# Altium PCB PCB1.PcbDoc (part 2 of 3)
Units mm, origin at the board's own origin, x right, y up, seen from the top; angles counter-clockwise.
Board outline 100 x 60 mm, 4 copper layers (Top Layer, GND, POWER, Bottom Layer), stack 1.592 mm thick; 134 components, 201 nets, 911 pads, 539 vias.
Unrouted connection lines stored in the file: 3.
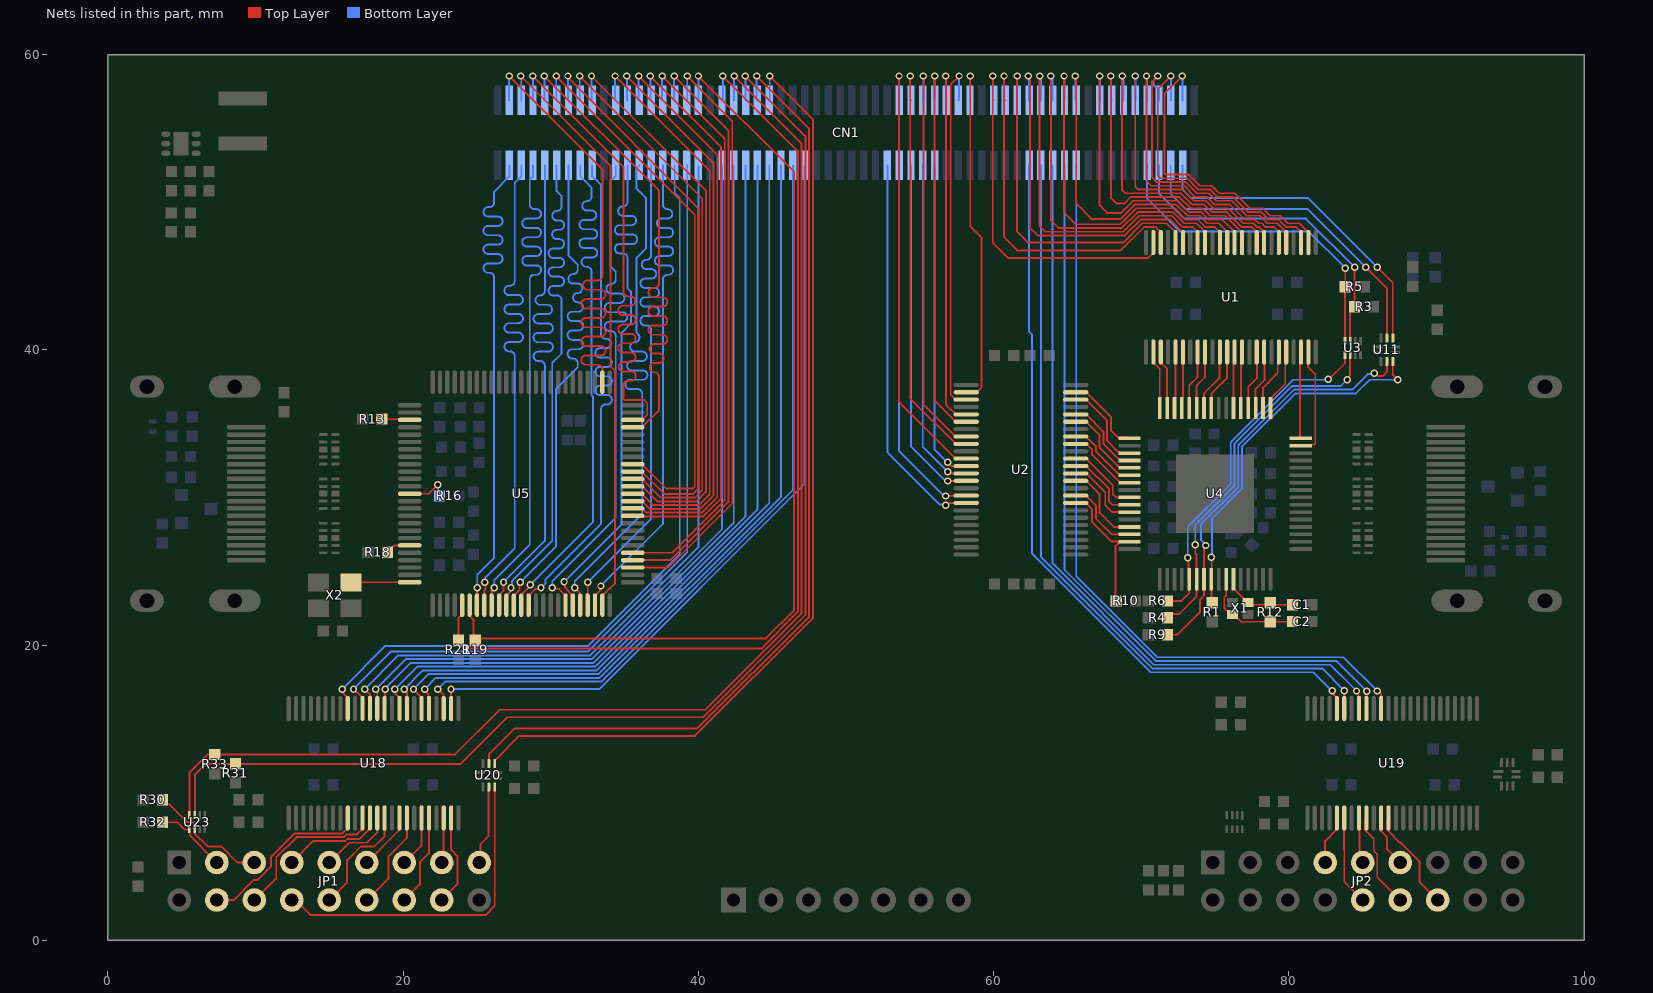
[diagram p4: the nets of this part, all layers, seen from the top]

## Via types
v1: diameter 0.5, hole 0.3, Top Layer to Bottom Layer, tented top, 493 vias
v2: diameter 0.5, hole 0.3, Top Layer to Bottom Layer, 46 vias

## Nets (pads, with @x,y where several pads share a name; then routed paths per layer and width w, separated by ;. In a path a pad name is that pad's centre, name@x,y a point inside that pad or via, vN(x,y) a via of type N, cw(c..) or ccw(c..) an arc to the next point about the centre after c; other vN are vias at no path point) (continued)
ADV_RX_DE_1V8: CN1.49 U2.38 | length 23.7
  Top Layer w0.127: v1(56.896,31.115) 58.128,31.115 U2.38@58.141,31.128
  Bottom Layer w0.127: CN1.49@54.399,52.497 54.399,33.474 56.66,31.213 56.711,31.213 56.809,31.115 v1(56.896,31.115)
ADV_RX_DE_3V3: U2.11 U4.45 | length 5.7
  Top Layer w0.127: U2.11@65.557,31.128 66.275,31.128 67.183,30.22 67.183,28.956 68.135,28.004 U4.45@69.201,28.004
ADV_RX_HS_1V8: CN1.51 U2.40 | length 25.2
  Top Layer w0.127: v1(56.769,30.099) 56.783,30.113 58.127,30.113 U2.40@58.141,30.127
  Bottom Layer w0.127: CN1.51@53.599,52.497 53.599,33.142 56.521,30.22 56.547,30.22 56.668,30.099 v1(56.769,30.099)
ADV_RX_HS_3V3: U2.9 U4.46 | length 5.3
  Top Layer w0.127: U2.9@65.557,30.127 66.275,30.127 66.929,29.473 66.929,28.575 67.998,27.506 U4.46@69.201,27.506
ADV_RX_INT1_1V8: CN1.5 U11.9 | length 22.6
  Top Layer w0.127: v1(85.217,45.593) 86.639,44.171 U11.9@86.639,40.805
  Bottom Layer w0.127: CN1.5@71.999,52.497 71.999,50.556 73.025,49.53 81.28,49.53 v1(85.217,45.593)
ADV_RX_INT1_3V3: R9.1 U4.55 U11.4 | length 28.5
  Top Layer w0.127: R9.1@71.77,20.701 72.45,20.701 73.993,22.244 73.993,23.096 74.251,23.354 U4.55@74.251,24.455 74.251,26.534 74.363,26.646 v1(74.363,26.747) ; v1(85.775,38.413) 85.876,38.413 86.069,38.221 86.354,38.221 86.639,38.506 U11.4@86.639,39.205
  Bottom Layer w0.127: v1(74.363,26.747) 74.363,26.816 74.041,27.138 74.041,28.172 76.57,30.701 76.57,33.526 80.348,37.304 84.282,37.304 85.335,38.357 85.718,38.357 v1(85.775,38.413)
ADV_RX_LLC_1V8: CN1.22 U1.37 | length 22.9
  Top Layer w0.127: v1(65.532,58.547) 65.594,58.485 65.594,49.916 66.65,48.859 68.572,48.859 69.554,49.841 72.374,49.841 73.136,49.079 73.949,49.079 74.457,48.571 75.24,48.571 75.824,47.987 U1.37@75.824,47.269
  Bottom Layer w0.127: v1(65.532,58.547) 65.532,56.965 CN1.22@65.601,56.896
ADV_RX_LLC_3V3: U1.12 U4.25 | length 4.2
  Top Layer w0.127: U4.25@74.751,36.055 74.751,37.031 75.819,38.099 U1.12@75.819,39.797
ADV_RX_P0_1V8: CN1.47 U2.37 | length 22.7
  Top Layer w0.127: v1(56.896,31.75) 56.983,31.75 57.105,31.628 U2.37@58.141,31.628
  Bottom Layer w0.127: CN1.47@55.199,52.497 55.199,33.446 v1(56.896,31.75)
ADV_RX_P0_3V3: U2.12 U4.43 | length 5.2
  Top Layer w0.127: U2.12@65.557,31.628 66.275,31.628 67.564,30.339 67.564,29.464 68.024,29.004 U4.43@69.201,29.004
ADV_RX_P1_1V8: CN1.45 U2.36 | length 21.9
  Top Layer w0.127: v1(56.896,32.385) 56.896,32.375 57.14,32.131 58.136,32.131 U2.36@58.141,32.126
  Bottom Layer w0.127: CN1.45@55.999,52.497 55.999,33.233 56.848,32.385 v1(56.896,32.385)
ADV_RX_P1_3V3: U2.13 U4.42 | length 5.2
  Top Layer w0.127: U2.13@65.557,32.126 66.275,32.126 67.818,30.583 67.818,29.718 68.031,29.505 U4.42@69.201,29.505
ADV_RX_P2_1V8: CN1.52 U2.35 | length 29.9
  Top Layer w0.127: v1(53.594,58.547) 53.594,36.455 57.423,32.626 U2.35@58.141,32.626
  Bottom Layer w0.127: v1(53.594,58.547) 53.594,56.901 CN1.52@53.599,56.896
ADV_RX_P2_3V3: U2.14 U4.41 | length 5.1
  Top Layer w0.127: U2.14@65.557,32.626 66.275,32.626 68.072,30.829 68.072,30.226 68.293,30.005 U4.41@69.201,30.005
ADV_RX_P3_1V8: CN1.50 U2.33 | length 28.6
  Top Layer w0.127: v1(54.356,58.547) 54.356,36.694 57.423,33.627 U2.33@58.141,33.627
  Bottom Layer w0.127: v1(54.356,58.547) 54.356,56.939 CN1.50@54.399,56.896
ADV_RX_P3_3V3: U2.16 U4.39 | length 4.9
  Top Layer w0.127: U2.16@65.557,33.627 66.275,33.627 66.675,33.227 66.675,32.885 68.372,31.189 68.392,31.189 68.575,31.006 U4.39@69.201,31.006
ADV_RX_P4_1V8: CN1.48 U2.32 | length 27.7
  Top Layer w0.127: v1(55.245,58.547) 55.245,36.305 57.423,34.127 U2.32@58.141,34.127
  Bottom Layer w0.127: CN1.48@55.199,56.896 55.245,56.942 v1(55.245,58.547)
ADV_RX_P4_3V3: U2.17 U4.38 | length 4.9
  Top Layer w0.127: U2.17@65.557,34.127 66.275,34.127 66.929,33.473 66.929,33.132 68.372,31.689 68.39,31.689 68.575,31.504 U4.38@69.201,31.504
ADV_RX_P5_1V8: CN1.46 U2.30 | length 26.4
  Top Layer w0.127: v1(56.007,58.547) 56.007,36.544 57.423,35.128 U2.30@58.141,35.128
  Bottom Layer w0.127: CN1.46@55.999,56.896 56.007,56.904 v1(56.007,58.547)
ADV_RX_P5_3V3: U2.19 U4.37 | length 5.4
  Top Layer w0.127: U2.19@65.557,35.128 66.275,35.128 67.183,34.22 67.183,33.378 68.372,32.189 68.39,32.189 68.575,32.004 U4.37@69.201,32.004
ADV_RX_P6_1V8: CN1.44 U2.29 | length 25.6
  Top Layer w0.127: v1(56.769,58.547) 56.769,36.28 57.423,35.626 U2.29@58.141,35.626
  Bottom Layer w0.127: v1(56.769,58.547) 56.769,56.927 CN1.44@56.8,56.896
ADV_RX_P6_3V3: U2.20 U4.36 | length 5.4
  Top Layer w0.127: U2.20@65.557,35.626 66.275,35.626 67.437,34.464 67.437,33.625 68.372,32.69 68.39,32.69 68.575,32.504 U4.36@69.201,32.504
ADV_RX_P7_1V8: CN1.42 U2.27 | length 24.7
  Top Layer w0.127: v1(57.658,58.547) 57.093,57.982 57.093,36.957 57.423,36.627 U2.27@58.141,36.627
  Bottom Layer w0.127: CN1.42@57.6,56.896 57.658,56.954 v1(57.658,58.547)
ADV_RX_P7_3V3: U2.22 U4.35 | length 5.9
  Top Layer w0.127: U2.22@65.557,36.627 66.275,36.627 67.691,35.211 67.691,33.837 68.417,33.112 68.468,33.112 68.575,33.005 U4.35@69.201,33.005
ADV_RX_P8_1V8: CN1.40 U2.26 | length 24.3
  Top Layer w0.127: U2.26@58.141,37.127 58.858,37.127 59.188,37.457 59.188,47.591 58.42,48.359 v1(58.42,58.547)
  Bottom Layer w0.127: CN1.40@58.4,56.896 58.42,56.916 v1(58.42,58.547)
ADV_RX_P8_3V3: U2.23 U4.33 | length 5.5
  Top Layer w0.127: U2.23@65.557,37.127 66.275,37.127 67.945,35.457 67.945,34.544 68.422,34.067 69.14,34.067 U4.33@69.201,34.006
ADV_RX_P9_1V8: CN1.36 U1.47 | length 25.1
  Top Layer w0.127: v1(59.944,58.547) 59.944,47.244 60.966,46.222 70.459,46.222 70.823,46.585 U1.47@70.823,47.269
  Bottom Layer w0.127: v1(59.944,58.547) 59.944,56.952 CN1.36@60,56.896
ADV_RX_P9_3V3: U1.2 U4.32 | length 4
  Top Layer w0.127: U1.2@70.823,39.853 70.823,39.135 71.251,38.707 U4.32@71.251,36.055
ADV_RX_P10_1V8: CN1.34 U1.46 | length 25.1
  Top Layer w0.127: v1(60.706,58.547) 60.706,47.625 61.595,46.736 68.605,46.736 70.186,48.317 70.993,48.317 71.323,47.987 U1.46@71.323,47.269
  Bottom Layer w0.127: v1(60.706,58.547) 60.706,56.99 CN1.34@60.8,56.896
ADV_RX_P10_3V3: U1.3 U4.31 | length 4
  Top Layer w0.127: U1.3@71.323,39.853 71.323,39.135 71.751,38.707 U4.31@71.751,36.055
ADV_RX_P11_1V8: CN1.32 U1.44 | length 24.7
  Top Layer w0.127: v1(61.595,58.547) 61.595,48.006 62.332,47.269 68.779,47.269 70.08,48.571 71.706,48.571 72.324,47.954 U1.44@72.324,47.269
  Bottom Layer w0.127: CN1.32@61.595,56.901 v1(61.595,58.547)
ADV_RX_P11_3V3: U1.5 U4.30 | length 3.8
  Top Layer w0.127: U4.30@72.252,36.055 72.252,36.681 72.324,36.754 U1.5@72.324,39.853
ADV_RX_P12_1V8: CN1.30 U1.43 | length 24.1
  Top Layer w0.127: v1(62.357,58.547) 62.357,58.46 62.461,58.356 62.461,48.283 62.997,47.747 68.897,47.747 69.975,48.825 71.953,48.825 72.824,47.954 U1.43@72.824,47.269
  Bottom Layer w0.127: v1(62.357,58.547) 62.4,58.504 CN1.30@62.4,56.896
ADV_RX_P12_3V3: U1.6 U4.29 | length 3.8
  Top Layer w0.127: U4.29@72.75,36.055 72.75,36.681 72.824,36.756 U1.6@72.824,39.853
ADV_RX_P13_1V8: CN1.28 U1.41 | length 24.3
  Top Layer w0.127: v1(63.119,58.547) 63.119,48.387 63.505,48.001 68.791,48.001 69.87,49.079 72.058,49.079 72.82,48.317 73.492,48.317 73.823,47.987 U1.41@73.823,47.269
  Bottom Layer w0.127: v1(63.119,58.547) 63.119,58.46 63.2,58.378 CN1.28@63.2,56.896
ADV_RX_P13_3V3: U1.8 U4.28 | length 4
  Top Layer w0.127: U4.28@73.25,36.055 73.25,37.587 73.823,38.159 U1.8@73.823,39.853
ADV_RX_P14_1V8: CN1.26 U1.40 | length 23.9
  Top Layer w0.127: v1(63.881,58.547) 63.881,48.768 64.394,48.255 68.686,48.255 69.765,49.333 72.163,49.333 72.925,48.571 73.739,48.571 74.323,47.987 U1.40@74.323,47.269
  Bottom Layer w0.127: v1(63.881,58.547) 63.881,58.46 64,58.34 CN1.26@64,56.896
ADV_RX_P14_3V3: U1.9 U4.27 | length 4
  Top Layer w0.127: U4.27@73.75,36.055 73.75,37.587 74.323,38.159 U1.9@74.323,39.853
ADV_RX_P15_1V8: CN1.24 U1.38 | length 23.6
  Top Layer w0.127: v1(64.77,58.547) 64.77,49.302 65.563,48.509 68.581,48.509 69.66,49.587 72.268,49.587 73.03,48.825 73.844,48.825 74.352,48.317 74.994,48.317 75.324,47.987 U1.38@75.324,47.269
  Bottom Layer w0.127: v1(64.77,58.547) 64.801,58.516 CN1.24@64.801,56.896
ADV_RX_P15_3V3: U1.11 U4.26 | length 4.2
  Top Layer w0.127: U4.26@74.251,36.055 74.251,37.048 75.311,38.108 U1.11@75.311,39.85
ADV_RX_P16_1V8: CN1.18 U1.36 | length 21.7
  Top Layer w0.127: v1(67.183,58.547) 67.183,49.784 67.691,49.276 68.63,49.276 69.028,49.674 69.449,50.095 72.479,50.095 73.241,49.333 74.054,49.333 74.562,48.825 75.484,48.825 76.322,47.987 U1.36@76.322,47.269
  Bottom Layer w0.127: v1(67.183,58.547) 67.201,58.529 CN1.18@67.201,56.896
ADV_RX_P16_3V3: U1.13 U4.22 | length 3.8
  Top Layer w0.127: U4.22@76.25,36.055 76.25,39.022 76.322,39.094 U1.13@76.322,39.853
ADV_RX_P17_1V8: CN1.16 U1.35 | length 20.8
  Top Layer w0.127: v1(67.945,58.547) 67.945,50.292 68.326,49.911 68.834,49.911 69.272,50.349 72.584,50.349 73.346,49.587 74.16,49.587 74.668,49.079 75.697,49.079 76.822,47.954 U1.35@76.822,47.269
  Bottom Layer w0.127: v1(67.945,58.547) 67.945,56.949 CN1.16@67.998,56.896
ADV_RX_P17_3V3: U1.14 U4.21 | length 3.8
  Top Layer w0.127: U4.21@76.75,36.055 76.75,39.022 76.822,39.094 U1.14@76.822,39.853
ADV_RX_P18_1V8: CN1.14 U1.33 | length 20.4
  Top Layer w0.127: v1(68.707,58.547) 68.707,50.8 68.904,50.603 69.688,50.603 72.689,50.603 73.451,49.841 74.265,49.841 74.773,49.333 75.802,49.333 76.818,48.317 77.493,48.317 77.823,47.987 U1.33@77.823,47.269
  Bottom Layer w0.127: v1(68.707,58.547) 68.707,58.46 68.799,58.368 CN1.14@68.799,56.896
ADV_RX_P18_3V3: U1.16 U4.20 | length 4
  Top Layer w0.127: U4.20@77.25,36.055 77.25,37.499 77.851,38.1 U1.16@77.851,39.835
ADV_RX_P19_1V8: CN1.12 U1.32 | length 19.9
  Top Layer w0.127: v1(69.596,58.547) 69.596,51.054 69.793,50.857 70.556,50.857 72.794,50.857 73.556,50.095 74.37,50.095 74.878,49.587 75.907,49.587 76.923,48.571 77.598,48.571 77.852,48.317 77.993,48.317 78.323,47.987 U1.32@78.323,47.269
  Bottom Layer w0.127: CN1.12@69.599,56.896 v1@69.599,58.544
ADV_RX_P19_3V3: U1.17 U4.19 | length 4.1
  Top Layer w0.127: U4.19@77.751,36.055 77.751,37.365 78.359,37.973 78.359,38.992 78.353,38.998 78.353,39.881 U1.17@78.359,39.887
ADV_RX_P20_1V8: CN1.10 U1.30 | length 19.9
  Top Layer w0.127: v1(70.358,58.547) 70.358,51.415 70.662,51.111 72.9,51.111 73.662,50.349 74.475,50.349 74.983,49.841 76.012,49.841 77.028,48.825 77.703,48.825 77.957,48.571 78.161,48.571 78.415,48.317 78.994,48.317 79.324,47.987 U1.30@79.324,47.269
  Bottom Layer w0.127: v1(70.358,58.547) 70.399,58.506 CN1.10@70.399,56.896
ADV_RX_P20_3V3: U1.19 U4.18 | length 4.2
  Top Layer w0.127: U4.18@78.251,36.055 78.251,37.445 79.248,38.442 U1.19@79.248,39.802
ADV_RX_P21_1V8: CN1.8 U1.29 | length 20.3
  Top Layer w0.127: v1(71.12,58.547) 70.739,58.166 70.739,51.689 71.063,51.365 73.005,51.365 73.767,50.603 74.58,50.603 75.088,50.095 76.118,50.095 77.134,49.079 78.012,49.079 78.52,48.571 79.207,48.571 79.822,47.956 U1.29@79.822,47.269
  Bottom Layer w0.127: v1(71.12,58.547) 70.818,58.245 70.818,57.996 70.839,57.974 70.839,57.906 70.914,57.832 71.012,57.832 71.199,57.645 CN1.8@71.199,56.896
ADV_RX_P21_3V3: U1.20 U4.17 | length 4.3
  Top Layer w0.127: U4.17@78.752,36.055 78.752,36.681 79.756,37.686 79.756,39.028 79.793,39.065 79.793,39.824 U1.20@79.756,39.861
ADV_RX_P22_1V8: CN1.6 U1.27 | length 20.8
  Top Layer w0.127: v1(72.009,58.547) 71.12,57.658 71.12,51.816 71.317,51.619 72.99,51.619 73.11,51.619 73.872,50.857 74.686,50.857 75.194,50.349 76.223,50.349 77.239,49.333 78.118,49.333 78.625,48.825 79.312,48.825 79.82,48.317 80.493,48.317 80.823,47.987 U1.27@80.823,47.269
  Bottom Layer w0.127: CN1.6@71.999,56.896 72.009,56.906 v1(72.009,58.547)
ADV_RX_P22_3V3: U1.22 U4.16 | length 5.9
  Top Layer w0.127: U1.22@80.757,39.857 80.794,39.82 80.794,39.065 80.757,39.028 80.757,34.05 U4.16@80.801,34.006
ADV_RX_P23_1V8: CN1.4 U1.26 | length 20.8
  Top Layer w0.127: v1(72.771,58.547) 71.571,57.347 71.571,51.947 71.645,51.873 73.215,51.873 73.977,51.111 74.791,51.111 75.299,50.603 76.328,50.603 77.344,49.587 78.223,49.587 78.731,49.079 79.417,49.079 79.925,48.571 80.706,48.571 81.323,47.954 U1.26@81.323,47.269
  Bottom Layer w0.127: v1(72.771,58.547) 72.799,58.519 CN1.4@72.799,56.896
ADV_RX_P23_3V3: U1.23 U4.15 | length 7.4
  Top Layer w0.127: U4.15@80.801,33.505 80.862,33.566 81.714,33.566 81.788,33.641 81.788,38.354 81.294,38.848 U1.23@81.294,39.811
ADV_RX_RESETN_1V8: CN1.3 U11.8 | length 22.2
  Top Layer w0.127: v1(85.979,45.593) 87.039,44.533 U11.8@87.039,40.805
  Bottom Layer w0.127: CN1.3@72.799,52.497 72.799,50.852 73.36,50.292 81.28,50.292 v1(85.979,45.593)
ADV_RX_RESETN_3V3: R1.1 U4.56 U11.5 | length 25.3
  Top Layer w0.127: v1(74.75,25.94) 74.777,25.913 74.777,24.481 U4.56@74.751,24.455 74.751,22.927 R1.1@74.803,22.875 ; U11.5@87.039,39.205 87.039,38.31 v1(87.376,37.973)
  Bottom Layer w0.127: v1(74.75,25.94) 74.803,25.993 74.803,28.575 76.824,30.596 76.824,33.421 80.453,37.05 84.548,37.05 85.471,37.973 v1(87.376,37.973)
ADV_RX_SCL_1V8: CN1.9 R5.1 U3.4 | length 22.5
  Top Layer w0.127: U3.4@83.802,40.612 83.802,44.264 R5.1@83.805,44.267 ; R5.1@83.82,44.282 v1(83.82,45.537)
  Bottom Layer w0.127: CN1.9@70.399,52.497 70.399,50.251 72.644,48.006 81.358,48.006 83.82,45.544 v1(83.82,45.537)
ADV_RX_SCL_3V3: R6.2 U3.5 U4.53 | length 23.7
  Top Layer w0.127: R6.2@71.77,22.987 72.723,22.987 73.25,23.514 U4.53@73.25,24.455 73.201,24.504 73.201,25.859 v1(73.152,25.908) ; v1(82.677,37.998) 82.702,37.998 83.802,39.098 U3.5@83.802,39.652
  Bottom Layer w0.127: v1(73.152,25.908) 73.152,28.002 76.062,30.912 76.062,33.736 80.299,37.973 82.652,37.973 v1(82.677,37.998)
ADV_RX_SDA_1V8: CN1.7 R3.1 U3.3 | length 22.3
  Top Layer w0.127: U3.3@84.153,40.612 84.153,42.639 84.455,42.941 v1(84.455,45.593)
  Bottom Layer w0.127: CN1.7@71.199,52.497 71.199,50.594 72.898,48.895 81.153,48.895 v1(84.455,45.593)
ADV_RX_SDA_3V3: R4.2 U3.6 U4.54 | length 25.3
  Top Layer w0.127: R4.2@71.77,21.844 72.024,22.098 72.558,22.098 73.738,23.278 73.738,24.443 U4.54@73.75,24.455 73.75,26.133 73.66,26.224 v1(73.66,26.797) ; v1(83.947,37.973) 83.947,38.074 84.153,38.28 U3.6@84.153,39.652
  Bottom Layer w0.127: v1(73.66,26.797) 73.66,28.15 76.316,30.806 76.316,33.631 80.243,37.558 83.532,37.558 v1(83.947,37.973)
ADV_RX_VS_ALSB_1V8: CN1.53 U2.41 | length 26.3
  Top Layer w0.127: v1(56.769,29.464) 56.87,29.464 57.032,29.627 U2.41@58.141,29.627
  Bottom Layer w0.127: CN1.53@52.799,52.497 52.799,33.053 56.329,29.523 56.71,29.523 v1(56.769,29.464)
ADV_RX_VS_ALSB_3V3: R10.2 U2.8 U4.47 | length 9.4
  Top Layer w0.127: U2.8@65.557,29.627 66.242,29.627 66.675,29.193 66.675,28.321 67.991,27.005 68.575,27.005 U4.47@69.201,27.005 ; R10.2@68.311,22.987 68.26,23.038 68.26,26.717 68.363,26.82 68.381,26.82 68.505,26.944 68.514,26.944 68.566,26.996 U4.47@68.566,27.005
ADV_RX_XTALN: C1.2 R12.2 U4.59 X1.3 | length 5.2
  Top Layer w0.102: U4.59@76.25,24.455 76.25,23.829 76.909,23.17 76.909,23.128 77.158,22.879 X1.3@77.233,22.879 77.364,22.748 78.613,22.748 R12.2@78.74,22.875 78.882,22.733 C1.2@80.249,22.733
ADV_RX_XTALP: C2.2 R12.1 U4.58 X1.1 | length 7
  Top Layer w0.102: U4.58@75.752,24.455 75.752,23.374 75.63,23.253 75.63,22.505 75.807,22.328 75.934,22.328 X1.1@76.183,22.079 76.258,22.079 76.762,21.575 R12.1@78.74,21.575 80.137,21.575 80.152,21.59 C2.2@80.249,21.59
ADV_TX_CEC_CLK: U5.50 X2.3 | length 4
  Top Layer w0.127: X2.3@16.467,24.242 16.48,24.255 U5.50@20.449,24.255
ADV_TX_D4: CN1.110 U5.92 | length 38.3
  Top Layer w0.127: v1(30.368,58.547) 39.751,49.164 39.751,30.734 39.624,30.607 37.829,30.607 36.18,32.256 U5.92@35.549,32.256
  Bottom Layer w0.127: v1(30.368,58.547) 30.368,56.927 CN1.110@30.399,56.896
ADV_TX_D5: CN1.108 U5.91 | length 38.5
  Top Layer w0.127: v1(31.166,58.547) 31.166,58.46 31.282,58.344 31.282,58.329 40.005,49.606 40.005,30.607 39.644,30.246 37.689,30.246 36.18,31.755 U5.91@35.549,31.755
  Bottom Layer w0.127: v1(31.166,58.547) 31.166,56.929 CN1.108@31.199,56.896
ADV_TX_D6: CN1.106 U5.90 | length 38.6
  Top Layer w0.127: v1(31.963,58.547) 40.259,50.251 40.259,30.48 39.771,29.992 37.442,29.992 36.18,31.255 U5.90@35.549,31.255
  Bottom Layer w0.127: v1(31.963,58.547) 31.963,56.932 CN1.106@31.999,56.896
ADV_TX_D7: CN1.104 U5.89 | length 38.7
  Top Layer w0.127: v1(32.761,58.547) 40.513,50.795 40.513,30.758 40.513,30.375 39.877,29.738 37.215,29.738 36.199,30.754 U5.89@35.549,30.754
  Bottom Layer w0.127: v1(32.761,58.547) 32.761,56.934 CN1.104@32.799,56.896
ADV_TX_D8: CN1.100 U5.88 | length 38.5
  Top Layer w0.127: v1(34.356,58.547) 40.767,52.136 40.767,30.226 40.025,29.484 36.95,29.484 36.18,30.254 U5.88@35.549,30.254
  Bottom Layer w0.127: v1(34.356,58.547) 34.356,56.939 CN1.100@34.399,56.896
ADV_TX_D9: CN1.98 U5.87 | length 38.6
  Top Layer w0.127: v1(35.154,58.547) 41.021,52.68 41.021,30.121 40.131,29.23 36.706,29.23 36.183,29.754 U5.87@35.549,29.754
  Bottom Layer w0.127: v1(35.154,58.547) 35.154,56.942 CN1.98@35.199,56.896
ADV_TX_D10: CN1.96 U5.86 | length 38.7
  Top Layer w0.127: U5.86@35.549,29.256 36.18,29.256 36.46,28.976 40.236,28.976 41.275,30.016 41.275,53.223 v1(35.951,58.547)
  Bottom Layer w0.127: v1(35.951,58.547) 35.951,56.944 CN1.96@36,56.896
ADV_TX_D11: CN1.94 U5.85 | length 38.8
  Top Layer w0.127: U5.85@35.549,28.755 35.582,28.722 40.341,28.722 41.529,29.91 41.529,53.767 v1(36.749,58.547)
  Bottom Layer w0.127: v1(36.749,58.547) 36.749,56.947 CN1.94@36.8,56.896
ADV_TX_D16: CN1.92 U5.80 | length 39.9
  Top Layer w0.127: U5.80@35.549,26.256 38.234,26.256 41.783,29.805 41.783,54.31 v1(37.546,58.547)
  Bottom Layer w0.127: CN1.92@37.546,56.896 v1(37.546,58.547)
ADV_TX_D17: CN1.88 U5.78 | length 40.4
  Top Layer w0.127: U5.78@35.549,25.255 37.955,25.255 42.291,29.591 42.291,55.499 v1(39.243,58.547)
  Bottom Layer w0.127: CN1.88@39.2,56.896 39.243,56.939 v1(39.243,58.547)
ADV_TX_D18: CN1.116 U5.74 | length 40.5
  Top Layer w0.127: v1(27.973,58.549) 34.036,52.485 34.036,38.9 34.354,38.583 34.354,24.191 34.036,23.873 33.499,23.336 U5.74@33.499,22.705
  Bottom Layer w0.127: v1(27.973,58.549) 27.999,58.523 CN1.116@27.999,56.896
ADV_TX_D19: CN1.91 U5.73 | length 38
  Top Layer w0.127: U5.73@32.999,22.705 32.999,23.389 33.033,23.389 33.33,23.686 33.33,23.932 v1(33.401,24.003)
  Bottom Layer w0.127: v1(33.401,24.003) 37.6,28.202 37.6,44.069 37.6,44.768 cw(c37.917,44.768) 37.917,45.085 37.974,45.085 ccw(c37.974,45.403) 37.974,45.72 37.371,45.72 cw(c37.371,46.038) 37.371,46.355 37.974,46.355 ccw(c37.974,46.673) 37.974,46.99 37.371,46.99 cw(c37.371,47.308) 37.371,47.625 37.974,47.625 ccw(c37.974,47.943) 37.974,48.26 37.501,48.26 cw(c37.501,48.578) 37.501,48.895 37.917,48.895 ccw(c37.917,49.213) 37.917,49.53 cw(c37.917,49.848) 37.6,49.848 37.6,50.665 CN1.91@37.6,52.497
ADV_TX_D20: CN1.93 U5.72 | length 37.9
  Top Layer w0.127: U5.72@32.498,22.705 32.505,22.712 32.505,24.25 v1(32.512,24.257)
  Bottom Layer w0.127: v1(32.512,24.257) 36.8,28.545 36.8,41.275 36.8,41.338 ccw(c36.482,41.338) 36.482,41.656 36.386,41.656 cw(c36.386,41.973) 36.386,42.291 37.028,42.291 ccw(c37.028,42.608) 37.028,42.926 36.386,42.926 cw(c36.386,43.243) 36.386,43.561 37.028,43.561 ccw(c37.028,43.878) 37.028,44.196 36.386,44.196 cw(c36.386,44.513) 36.386,44.831 36.827,44.831 ccw(c36.827,45.148) 36.827,45.466 36.482,45.466 cw(c36.482,45.783) 36.482,46.101 ccw(c36.482,46.418) 36.8,46.418 36.8,47.212 CN1.93@36.8,52.497
ADV_TX_D21: CN1.95 U5.71 | length 38
  Top Layer w0.127: v1(31.623,23.876) 31.965,23.534 31.965,22.738 U5.71@31.998,22.705
  Bottom Layer w0.127: v1(31.623,23.876) 31.623,24.315 36.195,28.887 36.195,36.957 36.195,37.02 ccw(c35.877,37.02) 35.877,37.338 35.369,37.338 cw(c35.369,37.655) 35.369,37.973 36.228,37.973 ccw(c36.228,38.291) 36.228,38.608 35.49,38.608 cw(c35.49,38.925) 35.49,39.243 36.195,39.243 ccw(c36.195,39.56) 36.195,39.878 35.695,39.878 cw(c35.695,40.195) 35.695,40.513 ccw(c35.695,40.831) 35.92,41.055 35.814,41.161 35.814,41.656 35.814,46.228 36.449,46.863 36.449,50.292 35.814,50.927 35.814,52.311 CN1.95@36,52.497
ADV_TX_D22: CN1.97 U5.70 | length 37.6
  Top Layer w0.127: v1(30.901,24.297) 30.972,24.226 30.972,23.883 31.5,23.355 U5.70@31.5,22.705
  Bottom Layer w0.127: v1(30.901,24.297) 34.798,28.194 34.798,41.148 35.433,41.783 35.433,43.942 35.199,44.176 35.199,46.155 35.199,46.218 ccw(c34.882,46.218) 34.882,46.536 34.661,46.536 cw(c34.661,46.853) 34.661,47.171 35.543,47.171 ccw(c35.543,47.488) 35.543,47.806 34.661,47.806 cw(c34.661,48.123) 34.661,48.441 35.47,48.441 ccw(c35.47,48.758) 35.47,49.076 34.882,49.076 cw(c34.882,49.393) 34.882,49.711 ccw(c34.882,50.028) 35.199,50.028 35.199,50.546 CN1.97@35.199,52.497
ADV_TX_D23: CN1.99 U5.69 | length 37.9
  Top Layer w0.127: v1(30.099,23.876) 30.159,23.816 30.539,23.816 31,23.355 U5.69@31,22.705
  Bottom Layer w0.127: v1(30.099,23.876) 30.099,24.337 34.399,28.637 34.399,40.894 34.399,40.958 ccw(c34.082,40.958) 34.082,41.275 33.972,41.275 cw(c33.972,41.593) 33.972,41.91 34.861,41.91 ccw(c34.861,42.228) 34.861,42.545 33.972,42.545 cw(c33.972,42.863) 33.972,43.18 34.668,43.18 ccw(c34.668,43.498) 34.668,43.815 34.082,43.815 cw(c34.082,44.133) 34.082,44.45 ccw(c34.082,44.768) 34.399,44.768 34.399,45.301 34.036,45.664 34.036,51.414 34.04,51.418 34.04,51.486 34.114,51.561 34.213,51.561 34.399,51.747 CN1.99@34.399,52.497
ADV_TX_D28: CN1.103 U5.64 | length 38.2
  Top Layer w0.127: U5.64@28.498,22.705 28.498,23.336 28.966,23.805 29.266,23.805 v1(29.337,23.876)
  Bottom Layer w0.127: v1(29.337,23.876) 29.655,24.194 29.655,24.453 33.401,28.199 33.401,35.286 33.401,35.984 cw(c33.718,35.984) 33.718,36.302 33.828,36.302 ccw(c33.828,36.619) 33.828,36.937 33.337,36.937 cw(c33.337,37.254) 33.337,37.572 33.828,37.572 ccw(c33.828,37.889) 33.828,38.207 33.337,38.207 cw(c33.337,38.524) 33.337,38.842 33.828,38.842 ccw(c33.828,39.159) 33.828,39.477 33.337,39.477 cw(c33.337,39.794) 33.337,40.112 33.758,40.112 ccw(c33.758,40.429) 33.758,40.747 33.718,40.747 cw(c33.718,41.064) 33.401,41.064 33.401,42.105 33.401,51.176 33.159,51.418 33.159,51.438 33.036,51.561 32.986,51.561 32.799,51.747 CN1.103@32.799,52.497
ADV_TX_D29: CN1.105 U5.63 | length 38.1
  Top Layer w0.127: U5.63@28,22.705 28,23.402 28.622,24.024 v1(28.622,24.083)
  Bottom Layer w0.127: v1(28.622,24.083) 32.86,28.321 32.86,36.831 32.766,36.924 32.766,45.244 32.766,45.307 ccw(c32.448,45.307) 32.448,45.625 32.4,45.625 cw(c32.4,45.942) 32.4,46.26 32.829,46.26 ccw(c32.829,46.577) 32.829,46.895 32.251,46.895 cw(c32.251,47.212) 32.251,47.53 32.829,47.53 ccw(c32.829,47.847) 32.829,48.165 32.262,48.165 cw(c32.262,48.482) 32.262,48.8 32.766,48.8 ccw(c32.766,49.117) 32.766,49.435 32.448,49.435 cw(c32.448,49.752) 32.448,50.07 ccw(c32.448,50.387) 32.766,50.387 32.766,50.8 32.766,50.98 31.999,51.747 CN1.105@31.999,52.497
ADV_TX_D30: CN1.107 U5.62 | length 38
  Top Layer w0.127: U5.62@27.5,22.705 27.5,23.355 27.887,23.743 27.887,24.204 v1(27.94,24.257)
  Bottom Layer w0.127: v1(27.94,24.257) 30.353,26.67 30.353,37.338 31.828,38.813 31.828,39.027 31.828,39.09 ccw(c31.511,39.09) 31.511,39.408 31.461,39.408 cw(c31.461,39.725) 31.461,40.043 31.881,40.043 ccw(c31.881,40.36) 31.881,40.678 31.461,40.678 cw(c31.461,40.995) 31.461,41.313 31.881,41.313 ccw(c31.881,41.63) 31.881,41.948 31.461,41.948 cw(c31.461,42.265) 31.461,42.583 31.869,42.583 ccw(c31.869,42.9) 31.869,43.218 31.828,43.218 cw(c31.828,43.535) 31.828,43.853 ccw(c31.829,44.17) 31.829,44.488 31.511,44.488 cw(c31.511,44.805) 31.511,45.123 ccw(c31.511,45.44) 31.828,45.44 31.828,45.769 31.658,45.939 31.199,46.398 CN1.107@31.199,52.497
ADV_TX_D31: CN1.109 U5.61 | length 38
  Top Layer w0.127: U5.61@26.999,22.705 26.999,23.355 27.238,23.594 27.238,23.809 v1(27.305,23.876)
  Bottom Layer w0.127: v1(27.305,23.876) 27.364,23.935 27.364,24.316 30.099,27.051 30.099,39.116 30.734,39.751 30.734,43.307 30.734,43.371 ccw(c30.416,43.371) 30.416,43.688 30.17,43.688 cw(c30.17,44.006) 30.17,44.323 30.591,44.323 ccw(c30.591,44.641) 30.591,44.958 30.17,44.958 cw(c30.17,45.276) 30.17,45.593 30.591,45.593 ccw(c30.591,45.911) 30.591,46.228 30.17,46.228 cw(c30.17,46.546) 30.17,46.863 30.591,46.863 ccw(c30.591,47.181) 30.591,47.498 30.413,47.498 cw(c30.413,47.816) 30.413,48.133 30.591,48.133 ccw(c30.591,48.451) 30.591,48.768 30.416,48.768 cw(c30.416,49.086) 30.416,49.403 ccw(c30.416,49.721) 30.734,49.721 30.734,50.419 30.399,50.754 CN1.109@30.399,52.497
ADV_TX_D32: CN1.111 U5.60 | length 38
  Top Layer w0.127: U5.60@26.499,22.705 26.499,23.364 26.797,23.662 v1(26.797,24.257)
  Bottom Layer w0.127: v1(26.797,24.257) 29.599,27.059 29.599,38.862 29.599,38.926 ccw(c29.281,38.926) 29.281,39.243 29.146,39.243 cw(c29.146,39.561) 29.146,39.878 29.827,39.878 ccw(c29.827,40.196) 29.827,40.513 29.146,40.513 cw(c29.146,40.831) 29.146,41.148 29.827,41.148 ccw(c29.827,41.466) 29.827,41.783 29.146,41.783 cw(c29.146,42.101) 29.146,42.418 29.778,42.418 ccw(c29.778,42.736) 29.778,43.053 29.281,43.053 cw(c29.281,43.371) 29.281,43.688 ccw(c29.281,44.006) 29.599,44.006 29.599,45.197 CN1.111@29.599,52.497
ADV_TX_D33: CN1.113 U5.59 | length 38
  Top Layer w0.127: U5.59@25.998,22.705 25.998,23.652 26.173,23.827 v1(26.173,23.876)
  Bottom Layer w0.127: v1(26.173,23.876) 26.173,24.395 28.575,26.797 28.575,44.069 28.575,44.767 cw(c28.892,44.767) 28.892,45.085 29.027,45.085 ccw(c29.027,45.402) 29.027,45.72 28.383,45.72 cw(c28.383,46.038) 28.383,46.355 29.027,46.355 ccw(c29.027,46.672) 29.027,46.99 28.383,46.99 cw(c28.383,47.307) 28.383,47.625 29.027,47.625 ccw(c29.027,47.942) 29.027,48.26 28.383,48.26 cw(c28.383,48.578) 28.383,48.895 29.027,48.895 ccw(c29.027,49.212) 29.027,49.53 28.892,49.53 cw(c28.892,49.847) 28.575,49.847 28.575,50.445 28.575,51.524 28.799,51.747 CN1.113@28.799,52.497
ADV_TX_D34: CN1.115 U5.58 | length 37.7
  Top Layer w0.127: U5.58@25.498,22.705 25.503,22.71 25.503,23.696 25.585,23.778 25.585,24.199 v1(25.527,24.257)
  Bottom Layer w0.127: v1(25.527,24.257) 25.567,24.297 25.567,24.551 27.559,26.543 27.559,39.518 27.559,39.581 ccw(c27.241,39.581) 27.241,39.899 27.175,39.899 cw(c27.175,40.216) 27.175,40.534 27.802,40.534 ccw(c27.802,40.851) 27.802,41.169 27.175,41.169 cw(c27.175,41.486) 27.175,41.804 27.802,41.804 ccw(c27.802,42.121) 27.802,42.439 27.175,42.439 cw(c27.175,42.756) 27.175,43.074 27.802,43.074 ccw(c27.802,43.391) 27.802,43.709 27.175,43.709 cw(c27.175,44.026) 27.175,44.344 27.241,44.344 ccw(c27.241,44.661) 27.559,44.661 27.559,45.085 27.559,51.308 27.812,51.561 27.999,51.747 CN1.115@27.999,52.497
ADV_TX_D35: CN1.117 U5.57 | length 37.7
  Top Layer w0.127: U5.57@25,22.705 25.01,22.714 25.01,23.867 v1(25.019,23.876)
  Bottom Layer w0.127: v1(25.019,23.876) 25.019,24.765 26.162,25.908 26.162,44.838 26.162,44.902 ccw(c25.845,44.902) 25.845,45.219 25.76,45.219 cw(c25.76,45.537) 25.76,45.854 26.42,45.854 ccw(c26.42,46.172) 26.42,46.489 25.76,46.489 cw(c25.76,46.807) 25.76,47.124 26.42,47.124 ccw(c26.42,47.442) 26.42,47.759 25.76,47.759 cw(c25.76,48.077) 25.76,48.394 26.42,48.394 ccw(c26.42,48.712) 26.42,49.029 25.76,49.029 cw(c25.76,49.347) 25.76,49.664 25.845,49.664 ccw(c25.845,49.982) 26.162,49.982 26.162,50.419 26.162,50.711 27.198,51.747 CN1.117@27.198,52.497
ADV_TX_DE: CN1.112 U5.97 | length 38
  Top Layer w0.127: v1(29.571,58.547) 37.338,50.78 37.338,45.212 37.338,44.513 cw(c37.02,44.513) 37.02,44.196 36.928,44.196 ccw(c36.928,43.878) 36.928,43.561 37.579,43.561 cw(c37.579,43.243) 37.579,42.926 36.928,42.926 ccw(c36.928,42.608) 36.928,42.291 37.579,42.291 cw(c37.579,41.973) 37.579,41.656 36.928,41.656 ccw(c36.928,41.338) 36.928,41.021 37.579,41.021 cw(c37.579,40.703) 37.579,40.386 37.006,40.386 ccw(c37.006,40.068) 37.006,39.751 37.338,39.751 cw(c37.338,39.433) 37.338,39.116 37.02,39.116 ccw(c37.02,38.798) 37.02,38.481 cw(c37.02,38.163) 37.338,38.163 37.338,35.954 37.338,35.913 36.18,34.755 U5.97@35.549,34.755
  Bottom Layer w0.127: v1(29.571,58.547) 29.571,56.924 CN1.112@29.599,56.896
ADV_TX_HS: CN1.114 U5.98 | length 38
  Top Layer w0.127: v1(28.773,58.547) 34.925,52.395 34.925,46.417 34.925,43.94 ccw(c35.242,43.94) 35.242,43.623 35.396,43.623 cw(c35.396,43.305) 35.396,42.988 34.888,42.988 ccw(c34.888,42.67) 34.888,42.353 35.434,42.353 cw(c35.434,42.035) 35.434,41.718 34.888,41.718 ccw(c34.888,41.4) 34.888,41.083 35.434,41.083 cw(c35.434,40.765) 35.434,40.448 34.888,40.448 ccw(c34.888,40.13) 34.888,39.813 35.434,39.813 cw(c35.434,39.495) 35.434,39.178 34.925,39.178 ccw(c34.925,38.86) 34.925,38.543 35.434,38.543 cw(c35.434,38.225) 35.434,37.908 35.242,37.908 ccw(c35.242,37.59) 34.925,37.59 34.925,36.892 34.925,36.668 34.999,36.594 36.34,36.594 36.539,36.394 36.539,35.615 36.18,35.255 U5.98@35.549,35.255
  Bottom Layer w0.127: v1(28.773,58.547) 28.799,58.522 CN1.114@28.799,56.896
ADV_TX_INT: R18.2 U5.45 | length 1.7
  Top Layer w0.127: R18.2@18.938,26.289 19.403,26.754 U5.45@20.449,26.754
ADV_TX_PCLK: CN1.90 U5.79 | length 40.2
  Top Layer w0.127: U5.79@35.549,25.756 38.093,25.756 42.037,29.7 42.037,54.864 v1(38.354,58.547)
  Bottom Layer w0.127: v1(38.354,58.547) 38.354,56.942 CN1.90@38.4,56.896
ADV_TX_PD: R16.2 U5.38 | length 3
  Top Layer w0.127: U5.38@20.449,30.254 21.745,30.254 v1(22.352,30.861)
  Bottom Layer w0.127: v1(22.352,30.861) 22.352,30.211 R16.2@22.464,30.099
ADV_TX_R_EXT: R13.2 U5.28 | length 1.9
  Top Layer w0.102: R13.2@18.557,35.306 19.694,35.306 19.745,35.255 U5.28@20.449,35.255
ADV_TX_SCL: CN1.82 R21.1 U5.55 | length 66.8
  Top Layer w0.127: U5.55@23.999,22.705 23.999,22.055 23.749,21.804 R21.1@23.749,20.335 24.066,20.018 24.178,20.018 24.32,19.875 24.432,19.764 44.253,19.764 46.736,22.247 46.736,53.467 v1(41.656,58.547)
  Bottom Layer w0.127: CN1.82@41.6,56.896 41.656,56.952 v1(41.656,58.547)
ADV_TX_SDA: CN1.86 R19.1 U5.56 | length 65.5
  Top Layer w0.127: U5.56@24.5,22.705 24.533,22.672 24.533,21.949 24.761,21.721 24.761,20.466 R19.1@24.892,20.335 25.004,20.447 44.577,20.447 46.482,22.352 46.482,52.07 v1(40.005,58.547)
  Bottom Layer w0.127: CN1.86@40,56.896 40.005,56.901 v1(40.005,58.547)
ADV_TX_VS: CN1.118 U5.2 | length 38
  Top Layer w0.127: v1(27.178,58.547) 33.499,52.226 33.499,45.622 33.499,45.022 cw(c33.182,45.022) 33.182,44.704 32.511,44.704 ccw(c32.511,44.387) 32.511,44.069 33.391,44.069 cw(c33.391,43.752) 33.391,43.434 32.384,43.434 ccw(c32.384,43.117) 32.384,42.799 33.391,42.799 cw(c33.391,42.482) 33.391,42.164 32.384,42.164 ccw(c32.384,41.847) 32.384,41.529 33.391,41.529 cw(c33.391,41.212) 33.391,40.894 32.384,40.894 ccw(c32.384,40.577) 32.384,40.259 33.391,40.259 cw(c33.391,39.942) 33.391,39.624 32.384,39.624 ccw(c32.384,39.307) 32.384,38.989 33.182,38.989 cw(c33.182,38.672) 33.499,38.672 33.499,38.608 U5.2@33.499,37.805
  Bottom Layer w0.127: v1(27.178,58.547) 27.178,56.916 CN1.118@27.198,56.896
CAM1_D0: JP1.7 U18.12 | length 7
  Top Layer w0.127: JP1.7@12.46,5.27 13.926,6.736 16.097,6.736 16.224,6.863 17.045,6.863 17.07,6.888 17.072,6.888 17.751,7.567 U18.12@17.751,8.292
CAM1_D0_1V8: CN1.85 U18.37 | length 53.9
  Top Layer w0.127: v1(17.399,17.018) 17.751,16.666 U18.37@17.751,15.708
  Bottom Layer w0.127: v1(17.399,17.018) 19.685,19.304 32.686,19.304 40.005,26.623 CN1.85@40.005,52.434
CAM1_D1: JP1.10 U18.14 | length 7.6
  Top Layer w0.127: JP1.10@15,2.73 16.208,3.938 16.208,5.429 17.134,6.355 18.039,6.355 18.749,7.065 U18.14@18.749,8.292
CAM1_D1_1V8: CN1.79 U18.35 | length 53.8
  Top Layer w0.127: U18.35@18.749,15.708 18.773,15.732 18.773,16.995 v1(18.796,17.018)
  Bottom Layer w0.127: v1(18.796,17.018) 18.796,17.087 20.505,18.796 32.897,18.796 42.4,28.3 CN1.79@42.4,52.497
CAM1_D2: JP1.9 U18.13 | length 5.1
  Top Layer w0.127: JP1.9@15,5.27 16.339,6.609 17.531,6.609 18.249,7.327 U18.13@18.249,8.292
CAM1_D2_1V8: CN1.81 U18.36 | length 53.9
  Top Layer w0.127: v1(18.15,17.018) 18.15,16.931 18.249,16.832 U18.36@18.249,15.708
  Bottom Layer w0.127: v1(18.15,17.018) 20.182,19.05 32.792,19.05 41.6,27.859 CN1.81@41.6,52.497
CAM1_D3: JP1.12 U18.17 | length 6.7
  Top Layer w0.127: JP1.12@17.54,2.73 19.022,4.212 19.022,5.702 20.25,6.931 U18.17@20.25,8.292
CAM1_D3_1V8: CN1.75 U18.32 | length 53.7
  Top Layer w0.127: v1(20.066,17.018) 20.066,16.941 20.25,16.756 U18.32@20.25,15.708
  Bottom Layer w0.127: v1(20.066,17.018) 21.336,18.288 33.107,18.288 44.001,29.181 CN1.75@44.001,52.497
CAM1_D4: JP1.11 U18.16 | length 3.9
  Top Layer w0.127: JP1.11@17.54,5.27 19.721,7.451 19.721,8.262 U18.16@19.75,8.292
CAM1_D4_1V8: CN1.77 U18.33 | length 53.8
  Top Layer w0.127: v1(19.431,17.018) 19.493,16.956 19.493,16.683 19.75,16.426 U18.33@19.75,15.708
  Bottom Layer w0.127: v1(19.431,17.018) 20.955,18.542 33.002,18.542 43.2,28.74 CN1.77@43.2,52.497
CAM1_D5: JP1.14 U18.20 | length 6.3
  Top Layer w0.127: JP1.14@20.08,2.73 21.134,3.784 21.134,5.275 21.749,5.89 U18.20@21.749,8.292
CAM1_D5_1V8: CN1.71 U18.29 | length 53.4
  Top Layer w0.127: v1(21.463,17.018) 21.525,16.956 21.525,16.829 21.732,16.622 21.732,15.725 U18.29@21.749,15.708
  Bottom Layer w0.127: v1(21.463,17.018) 22.225,17.78 33.318,17.78 45.601,30.063 CN1.71@45.601,52.497
CAM1_D6: JP1.13 U18.19 | length 3.5
  Top Layer w0.127: JP1.13@20.08,5.27 21.251,6.441 U18.19@21.251,8.292
CAM1_D6_1V8: CN1.73 U18.30 | length 53.7
  Top Layer w0.127: v1(20.701,17.018) 20.701,16.997 21.251,16.447 U18.30@21.251,15.708
  Bottom Layer w0.127: v1(20.701,17.018) 21.717,18.034 33.212,18.034 44.801,29.622 CN1.73@44.801,52.497
CAM1_D7: JP1.16 U18.23 | length 6.2
  Top Layer w0.127: JP1.16@22.62,2.73 23.674,3.784 23.674,5.707 23.25,6.13 U18.23@23.25,8.292
CAM1_D7_1V8: CN1.67 U18.26 | length 52.6
  Top Layer w0.127: v1(23.241,17.018) 23.246,17.013 23.246,15.713 U18.26@23.25,15.708
  Bottom Layer w0.127: v1(23.241,17.018) 33.274,17.018 47.201,30.945 CN1.67@47.201,52.497
CAM1_HREF: JP1.6 U18.11 | length 10.9
  Top Layer w0.127: JP1.6@9.92,2.73 11.406,4.216 11.406,5.617 12.779,6.99 15.992,6.99 16.182,7.18 16.864,7.18 17.251,7.567 U18.11@17.251,8.292
CAM1_HREF_1V8: CN1.87 U18.38 | length 54.3
  Top Layer w0.127: v1(16.637,17.018) 16.659,17.018 17.251,16.426 U18.38@17.251,15.708
  Bottom Layer w0.127: v1(16.637,17.018) 19.177,19.558 32.512,19.558 39.243,26.289 CN1.87@39.243,52.532
CAM1_PCLK: JP1.15 U18.22 | length 3.1
  Top Layer w0.127: JP1.15@22.62,5.27 22.745,5.395 22.745,8.287 U18.22@22.75,8.292
CAM1_PCLK_1V8: CN1.69 U18.27 | length 53.1
  Top Layer w0.127: v1(22.352,17.018) 22.74,16.63 22.74,15.718 U18.27@22.75,15.708
  Bottom Layer w0.127: v1(22.352,17.018) 22.86,17.526 33.423,17.526 46.401,30.504 CN1.69@46.401,52.497
CAM1_PWDN: JP1.17 U20.4 | length 5.1
  Top Layer w0.127: JP1.17@25.16,5.524 25.241,5.605 25.241,6.515 25.781,7.055 25.781,10.351 U20.4@25.806,10.376
CAM1_PWDN_1V8: CN1.76 U20.9 | length 65.9
  Top Layer w0.127: U20.9@25.806,11.976 25.806,12.598 27.559,14.351 39.918,14.351 47.498,21.931 47.498,54.991 v1(43.942,58.547)
  Bottom Layer w0.127: v1(43.942,58.547) 43.942,56.955 CN1.76@44.001,56.896
CAM1_RST: JP1.8 U20.5 | length 22.6
  Top Layer w0.127: JP1.8@12.46,2.984 13.73,1.714 25.581,1.714 26.206,2.339 U20.5@26.206,10.376
CAM1_RST_1V8: CN1.74 U20.8 | length 65.3
  Top Layer w0.127: U20.8@26.206,11.976 26.206,12.176 27.873,13.843 39.769,13.843 47.752,21.826 47.752,55.626 v1(44.831,58.547)
  Bottom Layer w0.127: CN1.74@44.801,56.896 44.831,56.926 v1(44.831,58.547)
CAM1_SCL: JP1.3 R32.1 U23.5 | length 5
  Top Layer w0.127: R32.1@3.698,8.001 4.707,8.001 5.215,7.493 5.522,7.493 5.546,7.469 5.546,7.104 JP1.3@7.38,5.27
CAM1_SCL_1V8: CN1.80 R33.2 U23.4 | length 88.8
  Top Layer w0.127: U23.4@5.522,8.48 5.522,11.364 6.742,12.584 7.235,12.584 R33.2@7.239,12.588 23.51,12.588 26.543,15.621 40.469,15.621 46.99,22.142 46.99,53.975 v1(42.418,58.547)
  Bottom Layer w0.127: CN1.80@42.4,56.896 42.418,56.914 v1(42.418,58.547)
CAM1_SDA: JP1.5 R30.1 U23.6 | length 8.4
  Top Layer w0.127: R30.1@3.698,9.525 4.009,9.215 4.165,9.215 5.355,8.024 5.734,8.024 5.848,7.909 5.848,7.544 5.897,7.496 5.897,7.224 6.757,6.364 7.687,6.364 8.781,5.27 JP1.5@9.92,5.27
CAM1_SDA_1V8: CN1.78 R31.2 U23.3 | length 88.5
  Top Layer w0.127: U23.3@5.872,8.48 5.89,8.498 5.89,11.224 6.619,11.953 8.631,11.953 R31.2@8.645,11.966 8.638,11.96 8.645,11.953 23.891,11.953 27.051,15.113 40.321,15.113 47.244,22.036 47.244,54.483 v1(43.18,58.547)
  Bottom Layer w0.127: v1(43.18,58.547) 43.18,56.916 CN1.78@43.2,56.896
CAM1_VS: JP1.4 U18.9 | length 11.9
  Top Layer w0.127: JP1.4@7.38,2.73 8.519,2.73 9.878,4.088 10.139,4.088 11.042,4.991 11.042,5.612 12.674,7.244 15.886,7.244 16.25,7.607 U18.9@16.25,8.292
CAM1_VS_1V8: CN1.89 U18.40 | length 54.6
  Top Layer w0.127: v1(15.875,17.018) 15.937,16.956 15.937,16.739 16.25,16.426 U18.40@16.25,15.708
  Bottom Layer w0.127: v1(15.875,17.018) 18.796,19.939 32.534,19.939 38.735,26.14 38.735,50.28 38.4,50.616 CN1.89@38.4,52.497
CAM2_D0: JP2.7 U19.5 | length 3.3
  Top Layer w0.127: JP2.7@82.46,5.27 82.46,6.726 83.246,7.512 U19.5@83.246,8.23
CAM2_D0_1V8: CN1.29 U19.44 | length 51.9
  Top Layer w0.127: v1(82.937,16.908) 82.993,16.852 82.993,16.684 83.251,16.426 U19.44@83.251,15.708
  Bottom Layer w0.127: CN1.29@62.4,52.497 62.4,41.224 62.611,41.013 62.611,26.202 70.652,18.161 81.661,18.161 82.914,16.908 v1(82.937,16.908)
CAM2_D1: JP2.10 U19.6 | length 6
  Top Layer w0.127: U19.6@83.746,8.23 83.746,6.187 83.749,6.184 83.749,3.981 JP2.10@85,2.73
CAM2_D1_1V8: CN1.27 U19.43 | length 52
  Top Layer w0.127: U19.43@83.751,15.708 83.759,15.716 v1(83.759,16.914)
  Bottom Layer w0.127: CN1.27@63.2,52.497 63.2,25.972 70.757,18.415 82.258,18.415 v1(83.759,16.914)
CAM2_D2: JP2.9 U19.8 | length 3.1
  Top Layer w0.127: U19.8@84.745,8.23 84.774,8.2 84.774,5.496 JP2.9@85,5.27
CAM2_D2_1V8: CN1.25 U19.41 | length 52.4
  Top Layer w0.127: v1(84.582,16.891) 84.582,16.79 84.72,16.652 84.72,16.457 84.75,16.427 U19.41@84.75,15.708
  Bottom Layer w0.127: CN1.25@64,52.497 64,25.531 70.862,18.669 82.804,18.669 v1(84.582,16.891)
CAM2_D3: JP2.12 U19.9 | length 6.5
  Top Layer w0.127: U19.9@85.245,8.23 85.181,8.166 85.181,7.449 85.753,6.876 85.753,6.07 85.991,5.833 85.991,4.279 JP2.12@87.54,2.73
CAM2_D3_1V8: CN1.23 U19.40 | length 52.4
  Top Layer w0.127: U19.40@85.25,15.708 85.268,15.726 v1(85.268,16.873)
  Bottom Layer w0.127: CN1.23@64.801,52.497 64.801,25.09 70.967,18.923 83.218,18.923 v1(85.268,16.873)
CAM2_D4: JP2.11 U19.11 | length 3.5
  Top Layer w0.127: U19.11@86.246,8.23 86.182,8.166 86.182,7.449 86.656,6.975 86.656,6.161 87.54,5.277 JP2.11@87.54,5.27
CAM2_D4_1V8: CN1.21 U19.38 | length 52.8
  Top Layer w0.127: v1(85.979,16.891) 86.057,16.891 86.251,16.698 U19.38@86.251,15.708
  Bottom Layer w0.127: CN1.21@65.601,52.497 65.601,24.649 71.073,19.177 83.693,19.177 v1(85.979,16.891)
CAM2_D5: JP2.14 U19.12 | length 7
  Top Layer w0.127: U19.12@86.746,8.23 86.683,8.166 86.683,7.449 87.509,6.623 87.588,6.623 88.839,5.372 88.839,3.971 JP2.14@90.08,2.73